# Altium PCB driver.PcbDoc
Units mm, origin at the board's own origin, x right, y up, seen from the top; angles counter-clockwise.
Board outline 80 x 80 mm, 2 copper layers (Top Layer, Bottom Layer), stack 1.569 mm thick; 40 components, 32 nets, 130 pads, 25 vias.
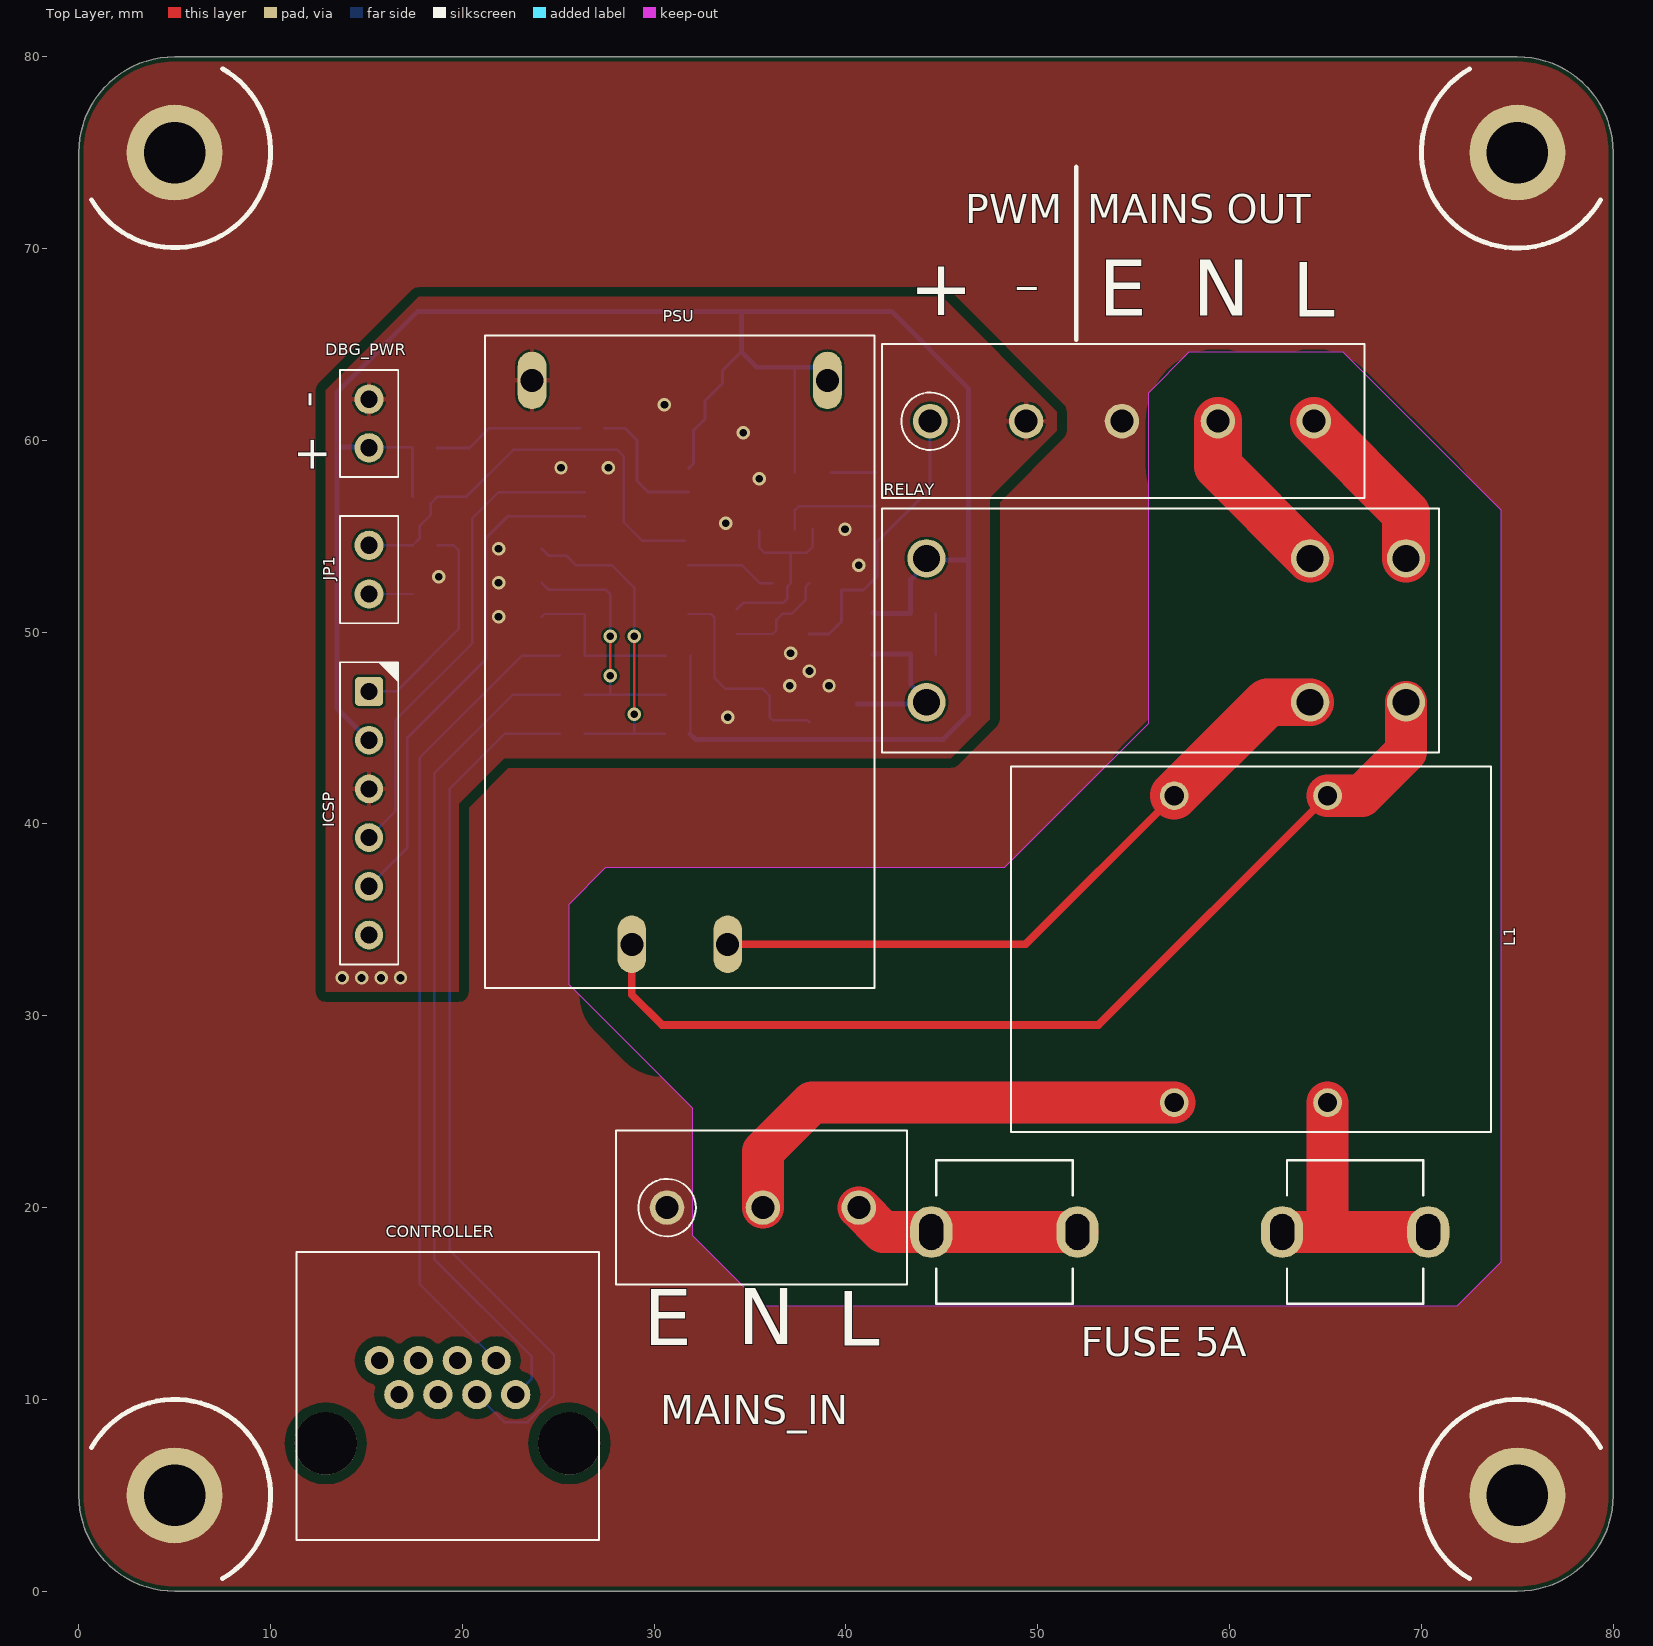
[diagram p0: Top Layer view]
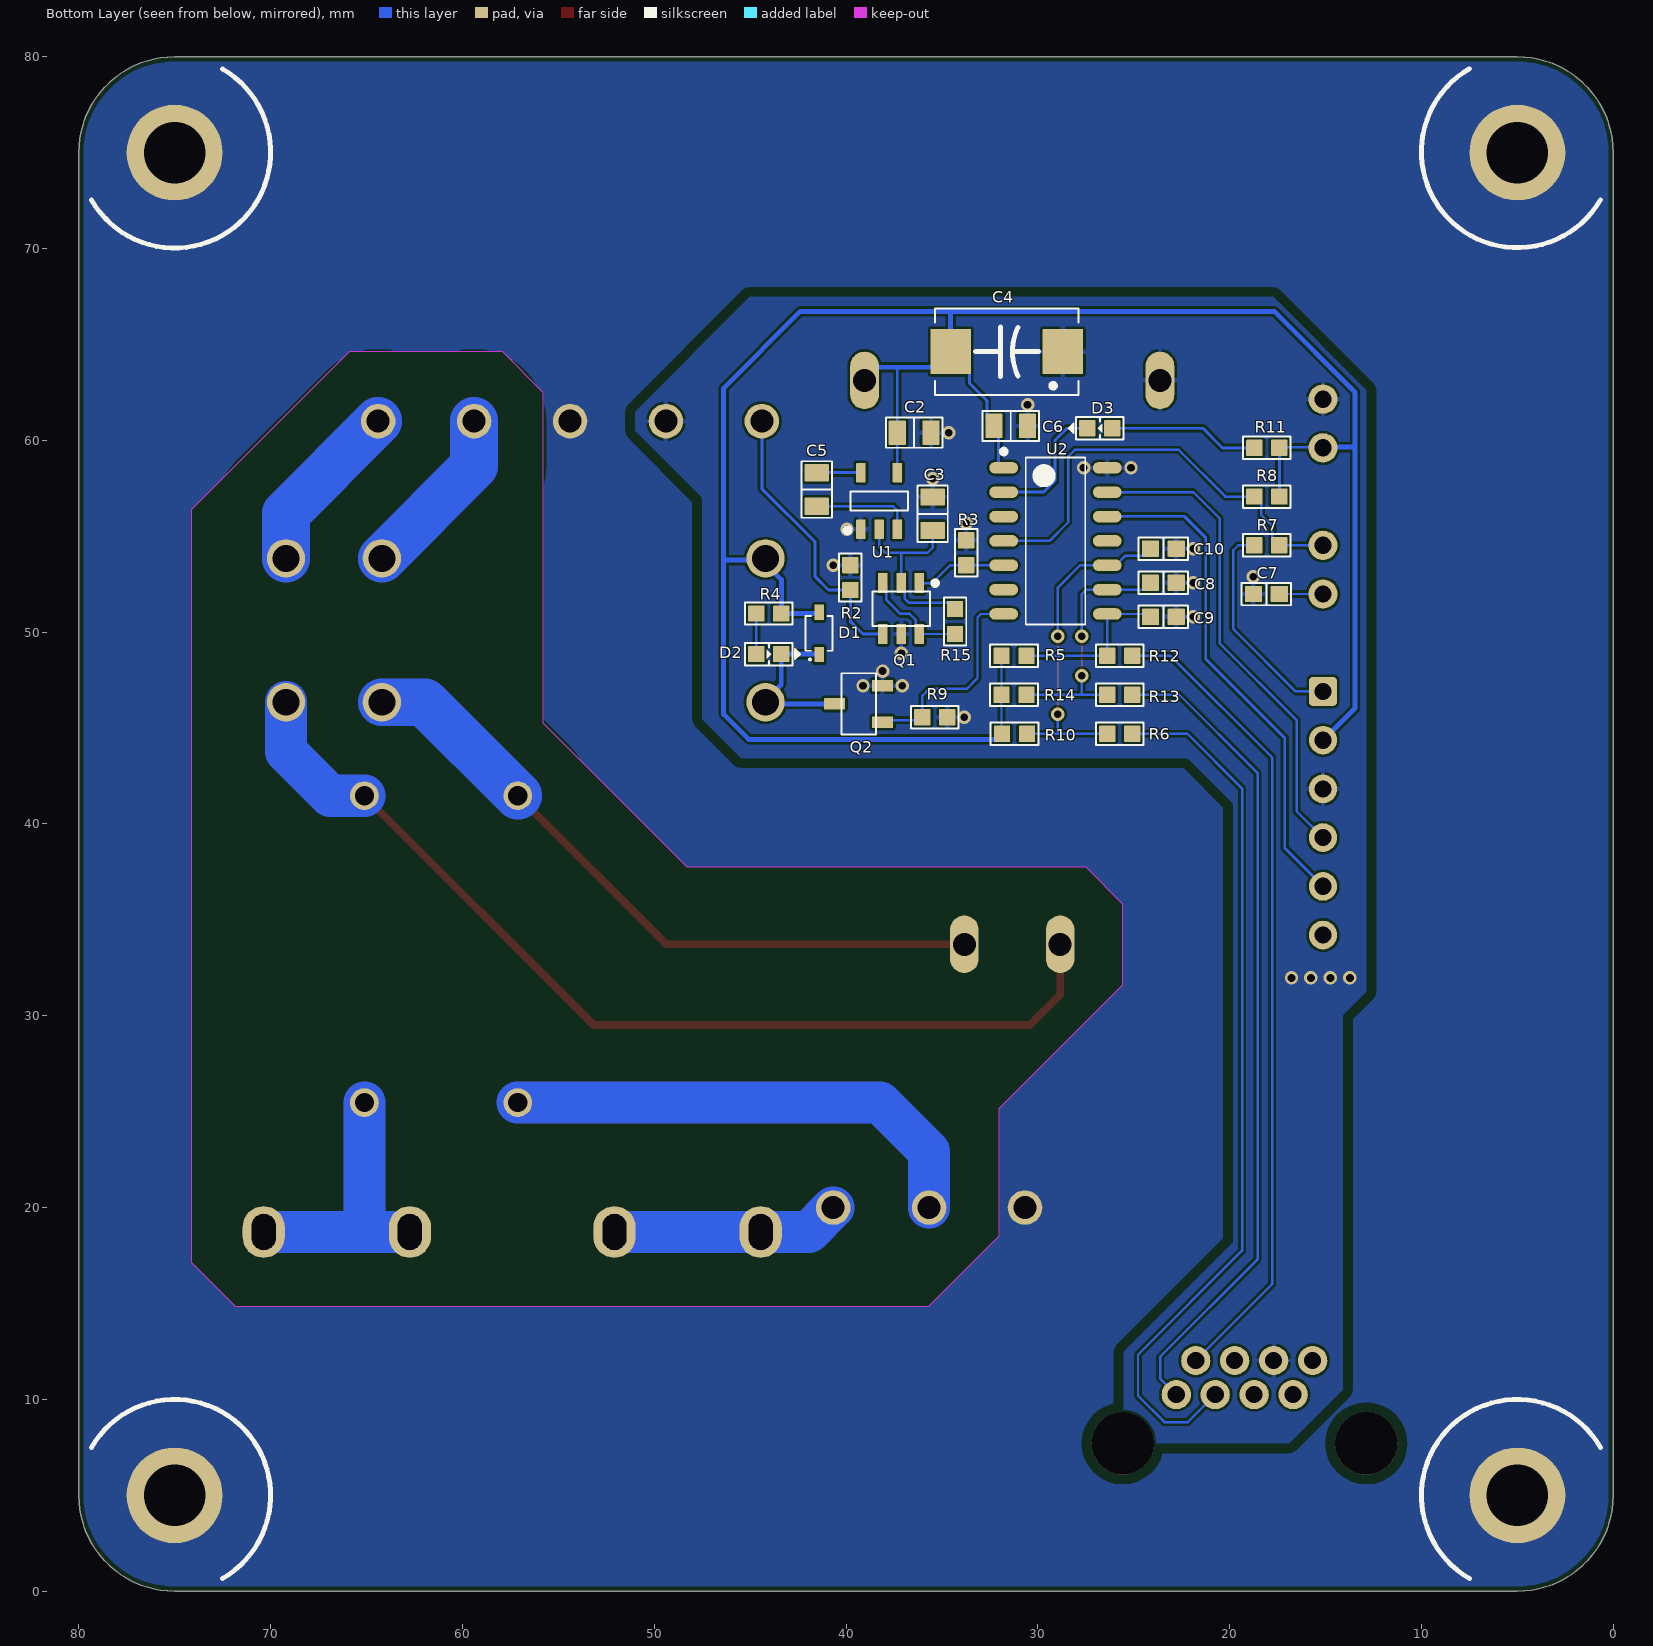
[diagram p1: Bottom Layer view, seen from below]

## Layer stack, top to bottom
Top Solder: solder mask 0.0254, SM-001, Dk 4
Top Layer: signal copper 0.035
Dielectric 1: core 1.4986, Core-043, Dk 4.3
Bottom Layer: signal copper 0.035
Bottom Solder: solder mask 0.0254, SM-001, Dk 4

## Board outline
5,0 cw(c5,5) 0,5 0,75 cw(c5,75) 5,80 75,80 cw(c75,75) 80,75 80,5 cw(c75,5) 75,0

## Design rules (kind name [scope] priority, off if disabled: settings)
BoardOutlineClearance [NOT (OnLayer('Top Overlay') OR OnLayer('Bottom Overlay'))] p1: gap=0.254 ignorepadtopadclearanceinfootprint=FALSE
Clearance Clearance_Earth_KO [InNet('EARTH') vs IsKeepOut OR (NOT InNetClass('MAINS'))] p1: gap=0.5 ignorepadtopadclearanceinfootprint=FALSE
Clearance Clearance_Earth_NPTH [InNet('EARTH') vs IsPad AND (NOT PadIsPlated)] p2: gap=0.25 ignorepadtopadclearanceinfootprint=FALSE
Clearance Clearance_Earth [InNetClass('MAINS')] p3: gap=2.5 ignorepadtopadclearanceinfootprint=FALSE
Clearance Clearance_Other [All] p4: gap=0.127 ignorepadtopadclearanceinfootprint=FALSE
ComponentClearance [All] p1: gap=0 collisioncheckmode=3 verticalgap=0.254 showdistances=FALSE
HoleSize [All] p1: absolutevalues=TRUE maxlimit=5 minlimit=0.4 maxpercent=80.000 minpercent=20.000
MinimumAnnularRing [All] p1: minimumring=0.15
MinimumSolderMaskSliver [All] p1: minsoldermaskwidth=0.1
PolygonConnect PolygonConnect_GndVia [IsVia AND InNet('GND') vs InNet('GND')] p1: connectstyle=Direct reliefconductorwidth=0.254 reliefentries=4 polygonreliefangle="90 Angle" airgapwidth=0.152
PolygonConnect PolygonConnect_EarthPads [IsPad AND (InComponent('PWM  MAINS OUT') OR InComponent('MAINS_IN')) vs InNet('EARTH')] p2: connectstyle=Direct reliefconductorwidth=0.254 reliefentries=4 polygonreliefangle="90 Angle" airgapwidth=0.152
PolygonConnect [All] p3: connectstyle=Relief reliefconductorwidth=0.254 reliefentries=4 polygonreliefangle="90 Angle" airgapwidth=0.127
RoutingVias [All] p1: holewidth=0.711 width=1.27 viastyle="Through Hole" minholewidth=0.711 minwidth=1.27 maxholewidth=0.711 maxwidth=1.27 useviatemplates=TRUE viatemplateguid#1={4F68C366-C401-404B-B93B-24472A54F0F3} viatemplatename#1=GND_VIA
SilkToSilkClearance [All] p1: silktosilkclearance=0
SilkToSolderMaskClearance [All] p1: minsilkscreentomaskgap=0 clearancetoexposedcopper=TRUE
SolderMaskExpansion [All] p1: expansion=0.102 istentingtop=FALSE
Width Width_Mains [InNetClass('MAINS')] p1: maxlimit=4 minlimit=0.254 preferedwidth=0.254
Width Width_Normal [All] p2: maxlimit=0.508 minlimit=0.127 preferedwidth=0.127 minimp=50.000000 maximp=50.000000 favimp=50.000000
25 further rules are at their usual default settings.

## Classes and differential pairs
net class MAINS: ACL ACL_F ACL_R ACL_S ACN ACN_R ACN_S EARTH

## Components (designator, comment, footprint, x,y, rotation, side; value= is the part's Value field where it differs from the comment)
C2 "1uF" "CAP 0805_2012" 36.447,60.402 r180 bottom
C3 "10uF" "CAP 0805_2012" 35.484,56.172 r90 bottom
C4 "47uF" CAPMP7343X11L 31.618,64.626 r0 bottom
C5 "10uF" "CAP 0805_2012" 41.524,57.438 r270 bottom
C6 "100nF" "CAP 0805_2012" 31.41,60.753 r180 bottom
C7 "10nF" "CAP 0603_1608" 18.085,51.99 r0 bottom
C8 "1nF" "CAP 0603_1608" 23.455,52.578 r180 bottom
C9 "1nF" "CAP 0603_1608" 23.455,50.8 r180 bottom
C10 "1nF" "CAP 0603_1608" 23.455,54.356 r180 bottom
CONTROLLER "RJ45JACK" RJHSE-5080 12.876,7.71 r0 top
D1 "DSF05S30U" SODFL250X100-2L 41.403,49.933 r90 bottom
D2 "20mA" "SMT_LED 0603_RED" 44.024,48.858 r180 bottom
D3 "20mA" "SMT_LED 0603_RED" 26.767,60.631 r0 bottom
DBG_PWR "JUMPER" JUMPER 15.132,59.61 r90 top
"FUSE 5A" "520_102701" BEL_FC-102-BRIGHT-TIN 48.259,18.73 r0 top
ICSP "HEADER6" HEADER6 15.132,46.91 r270 top
JP1 "JUMPER" JUMPER 15.132,54.53 r270 top
L1 "CHOKE" SC-40-200 57.11,25.474 r0 top
MAINS_IN "TERMINAL3" TERMINAL_BLOCK_3 30.668,20 r0 top
PSU "HLK-PM01" HLK-PM01 31.332,33.726 r90 top
"PWM  MAINS OUT" "TERMINAL5" TERMINAL_BLOCK_5 44.388,61 r0 top
Q1 "MOSFET-NP" DMG6601LVT 37.128,51.232 r270 bottom
Q2 "MOSFET-N" SOT23 39.345,46.26 r90 bottom
R2 "1K8" "RES 0603_1608" 39.776,52.847 r90 bottom
R3 "20K" "RES 0603_1608" 33.731,54.139 r270 bottom
R4 "4K7" "RES 0603_1608" 44.024,50.974 r180 bottom
R5 "20K" "RES 0603_1608" 31.242,48.768 r0 bottom
R6 "22r" "RES 0603_1608" 25.728,44.704 r0 bottom
R7 "100r" "RES 0603_1608" 18.06,54.53 r0 bottom
R8 "10K" "RES 0603_1608" 18.06,57.07 r0 bottom
R9 "20K" "RES 0603_1608" 35.369,45.564 r0 bottom
R10 "20K" "RES 0603_1608" 31.212,44.704 r0 bottom
R11 "4K7" "RES 0603_1608" 18.06,59.61 r180 bottom
R12 "22r" "RES 0603_1608" 25.728,48.768 r0 bottom
R13 "22r" "RES 0603_1608" 25.728,46.736 r0 bottom
R14 "20K" "RES 0603_1608" 31.242,46.736 r0 bottom
R15 "1K8" "RES 0603_1608" 34.315,50.557 r90 bottom
RELAY "HF118F" G5RL-1-E-HR 44.196,46.348 r0 top
U1 "MAX1683" SOT23-5 38.273,56.84 r90 bottom
U2 "PIC16F616" SOIC14 29.078,54.759 r180 bottom

## Footprints (in the part's own frame and the unit in brackets; to place one, negate y for a bottom-side part, rotate by r counter-clockwise, add the part's x,y. Pads: shape width x height; smd on the part's side, far side on the other; paste and mask are expansions set on the pad)
BEL_FC-102-BRIGHT-TIN [mm]
  oval 2.2x2.7 hole 1.88 slot 1.25 at 0 deg: 1(-3.81,0) 1(3.81,0) 2(14.478,0) 2(22.098,0)
  silkscreen extent -3.56,-3.75 21.84,3.75, body extent -4.06,-3.68 22.35,3.68, height 10.9
"CAP 0603_1608" [mm] "Chip Capacitor, 2-Leads, Body 1.60x0.80mm, IPC Medium Density"
  rrect10% 0.9x0.85 smd: 1(-0.675,0) 2(0.675,0)
  silkscreen extent -1.3,-0.58 1.3,0.58, body extent -0.8,-0.41 0.8,0.41, height 0.82
"CAP 0805_2012" [mm] "Chip Capacitor, 2-Leads, Body 2.00x1.20mm, IPC Medium Density"
  rrect10% 0.9x1.275 smd: 1(-0.876,0) 2(0.876,0)
  silkscreen extent -1.47,-0.79 1.47,0.79, body extent -1,-0.64 1,0.64, height 1.26
CAPMP7343X11L [mm] "Molded Capacitor, 2-Leads, Body 7.30x4.30mm, IPC High Density"
  rrect1% 2.1x2.35 smd: 1(2.925,0) 2(-2.925,0)
  silkscreen extent -3.75,-2.25 3.75,2.25, body extent -3.97,-2.25 3.97,2.25, height 1.1
DMG6601LVT [mm]
  rrect10% 1.05x0.5 smd: 1(-1.325,0.95) 2(-1.325,0) 3(-1.325,-0.95) 4(1.325,-0.95) 5(1.325,0) 6(1.325,0.95)
  silkscreen extent -1.45,-1.5 0.9,1.9, body extent -1.4,-1.45 1.4,1.45, height 1
G5RL-1-E-HR [mm] "16A 240v relay 5v coil 62.5ohm"
  round 2 hole 1.4: 1(0,0) 2(0,7.5) 3(20,0) 4(20,7.5) 5(25,0) 6(25,7.5)
  silkscreen extent -2.31,-2.62 26.72,10.11, body extent -2.3,-2.6 26.7,10.1, height 15.7
HEADER6 [mm] "6 pin 2.54mm header"
  rrect25% 1.5x1.45 hole 0.9: 1(0,0)
  oval 1.5x1.45 hole 0.9: 2(2.54,0) 3(5.08,0) 4(7.62,0) 5(10.16,0) 6(12.7,0)
  silkscreen extent -1.52,-1.52 14.22,1.68, body extent -1.27,-1.27 13.97,1.27, height 8.54
HLK-PM01 [mm] "5V PSU"
  oval 3x1.5 hole 1.2: 1(0,2.5) 2(0,-2.5) 3(29.4,7.7) 4(29.4,-7.7)
  silkscreen extent -2.29,-10.16 31.75,10.16, body extent -2.3,-10.1 31.7,10.1, height 15
JUMPER [mil] "2 pin 2.54mm jumper"
  round 60 hole 35.43: 1(0,0) 2(100,0)
  silkscreen extent -60,-60 160,60, body extent -50,-50 150,50, height 336
"RES 0603_1608" [mm] "Chip Resistor, 2-Leads, Body 1.60x0.80mm, IPC Medium Density"
  rrect10% 0.85x0.85 smd: 1(-0.65,0) 2(0.65,0)
  silkscreen extent -1.24,-0.58 1.24,0.58, body extent -0.8,-0.4 0.8,0.4, height 0.45
RJHSE-5080 [mil] "RJ45 Jack"
  round 60 hole 35: 1(390,100) 2(350,170) 3(310,100) 4(270,170) 5(230,100) 6(190,170) 7(150,100) 8(110,170)
  round 128 hole 128 unplated: M1(0,0) M2(500,0)
  silkscreen extent -60,-199 561,393, body extent -59,-198 561,392, height 506
SC-40-200 [mm] "Common mode choke"
  round 1.5 hole 1: 1(8,0) 2(8,16) 3(0,0) 4(0,16)
  silkscreen extent -8.51,-1.52 16.51,17.53, body extent -8.5,-1.5 16.5,17.5, height 22.34
"SMT_LED 0603_RED" [mm] "Chip Diode, 2-Leads, Body 1.60x0.80mm, IPC Medium Density"
  rrect10% 0.85x0.85 smd: 1(0.65,0) 2(-0.65,0)
  silkscreen extent -1.24,-0.58 1.63,0.58, body extent -0.8,-0.4 0.8,0.4, height 0.53
SODFL250X100-2L [mm] "SODFL, 2-Leads, Body 1.25x2.50mm, IPC High Density"
  rrect1% 0.8x0.5 smd: 1(1.1,0) 2(-1.1,0)
  silkscreen extent -1.4,-0.7 0.9,0.7, body extent -1.25,-0.68 1.25,0.68, height 1
SOIC14 [mm] "SOIC, 14-Leads, Body 8.65x3.90mm, Pitch 1.27mm, IPC Medium Density"
  oval 1.5x0.6 smd: 1(-2.7,3.81) 2(-2.7,2.54) 3(-2.7,1.27) 4(-2.7,0) 5(-2.7,-1.27) 6(-2.7,-2.54) 7(-2.7,-3.81) 8(2.7,-3.81) 9(2.7,-2.54) 10(2.7,-1.27) 11(2.7,0) 12(2.7,1.27) 13(2.7,2.54) 14(2.7,3.81)
  silkscreen extent -2.83,-4.35 1.55,4.78, body extent -3,-4.35 3,4.35, height 1.75
SOT23 [mm] "SOT23, 3-Leads, Body 2.90x2.30mm, Pitch 0.95mm, IPC High Density"
  rrect10% 0.6x1.1 smd: D(0,1.25) G(-0.95,-1.25) S(0.95,-1.25)
  silkscreen extent -1.6,-0.9 1.6,0.9, body extent -1.5,-1.3 1.5,1.3, height 1.1
SOT23-5 [mm] "SOT23, 5-Leads, Body 2.90x2.80mm, Pitch 0.95mm, IPC Medium Density"
  rrect10% 1x0.5 smd: 1(-1.475,0.95) 2(-1.475,0) 3(-1.475,-0.95) 4(1.475,-0.95) 5(1.475,0.95)
  silkscreen extent -1.65,-1.5 0.5,1.78, body extent -1.5,-1.5 1.5,1.5, height 1.25
TERMINAL_BLOCK_3 [mm] "3 Way 5mm screw terminal block"
  round 1.8 hole 1.2: 1(0,0) 2(5,0) 3(10,0)
  silkscreen extent -2.67,-4.01 12.52,4.01, body extent -2.65,-4 12.5,4, height 10
TERMINAL_BLOCK_5 [mm] "5 Way 5mm screw terminal block"
  round 1.8 hole 1.2: 1(0,0) 2(5,0) 3(10,0) 4(15,0) 5(20,0)
  silkscreen extent -2.5,-4.01 22.65,4.01, body extent -2.5,-4 22.65,4, height 10

## Part data
C2 C3 C5 C6 C7 C8 C9 C10: library part CAP_CERAMIC, "Ceramic capacitor"
C4: library part EEFCS1A470R, "Electrolytic Capacitor", Voltage=6.3V, MPN=EEFCS1A470R, TYPE=Polymer, Vendor=Panasonic
D1: "Schottky Diode 20v 500mA", Alternate=CUS551V30
D2 D3: library part LED, "LED"
"FUSE 5A": "5x20 5A fuse speed F"
MAINS_IN: "3 way terminal block"
PSU: "5V PSU 0.6A"
"PWM  MAINS OUT": "5 way terminal block"
Q1: "N/P Channel MOSFET", LCSC Part Number=C500791, Manufacturer Part Number=DMC2400UV-13
R2 R3 R4 R5 R6 R7 R8 R9 R10 R11 R12 R13 R14 R15: library part RESISTOR, "Resistor"
RELAY: "240V 10A Relay 5V"
U1: "Charge Pump"

## Free pads (board coordinates)
  round 5 hole 3.2: 1(5,5) 1(5,75) 1(75,5) 1(75,75)

## Via types
v1: diameter 0.7, hole 0.4, Top Layer to Bottom Layer, tented both sides, 25 vias

## Nets (pads, with @x,y where several pads share a name; then routed paths per layer and width w, separated by ;. In a path a pad name is that pad's centre, name@x,y a point inside that pad or via, vN(x,y) a via of type N, cw(c..) or ccw(c..) an arc to the next point about the centre after c; other vN are vias at no path point)
\MCLR: JP1.1 R7.1 R8.2 U2.4 | length 23.2
  Bottom Layer w0.127: JP1.1 R7.1 17.771,54.892 17.771,55.539 18.351,56.119 18.351,56.711 R8.2 20.218,57.07 22.66,59.512 28.069,59.512 28.415,59.166 28.415,55.735 29.392,54.759 U2.4@31.59,54.759
\MCLR_IN: ICSP.1 R7.2 | length 11.3
  Bottom Layer w0.127: ICSP.1 16.557,46.91 19.812,50.165 19.812,54.27 19.552,54.53 R7.2
ACL: L1.2 PSU.1 RELAY.5 | length 61.5
  Top Layer w0.406: PSU.1 28.832,31.105 30.414,29.523 53.158,29.523 L1.2
  Top Layer w2.2: L1.2 66.891,41.474 69.196,43.779 RELAY.5
  Bottom Layer w2.2: RELAY.5 69.196,43.779 66.891,41.474 ; 66.891,41.474 L1.2 66.891,41.474
ACL_F: "FUSE 5A.2" L1.1 | length 28.7
  Top Layer w2.2: 62.737,18.73 65.11,18.73 ; L1.1 65.11,18.73 ; 70.357,18.73 65.11,18.73
  Bottom Layer w2.2: 62.737,18.73 65.11,18.73 ; L1.1 65.11,18.73 ; 70.357,18.73 65.11,18.73
ACL_R: "FUSE 5A.1" MAINS_IN.3 | length 23.9
  Top Layer w2.2: MAINS_IN.3 41.938,18.73 44.449,18.73 52.069,18.73
  Bottom Layer w2.2: MAINS_IN.3 41.938,18.73 44.449,18.73 52.069,18.73
ACL_S: "PWM  MAINS OUT.5" RELAY.6 | length 18.3
  Top Layer w2.5: 64.388,61 69.196,56.192 RELAY.6
  Bottom Layer w2.5: 64.388,61 69.196,56.192 RELAY.6
ACN: L1.4 PSU.2 RELAY.3 | length 44.7
  Top Layer w0.406: PSU.2 49.362,33.726 L1.4
  Top Layer w2.5: L1.4 61.984,46.348 RELAY.3
  Bottom Layer w2.5: L1.4 61.984,46.348 RELAY.3
ACN_R: L1.3 MAINS_IN.2 | length 50.8
  Top Layer w2.2: MAINS_IN.2 35.668,22.918 38.224,25.474 L1.3
  Bottom Layer w2.2: MAINS_IN.2 35.668,22.918 38.224,25.474 L1.3
ACN_S: "PWM  MAINS OUT.4" RELAY.4 | length 18.3
  Top Layer w2.5: 59.388,61 59.388,58.656 RELAY.4
  Bottom Layer w2.5: 59.388,61 59.388,58.656 RELAY.4
BTN: C10.1 R6.2 R10.1 U2.10 | length 17.2
  Top Layer w0.127: v1(28.956,45.72) v1(28.956,49.783)
  Bottom Layer w0.127: C10.1 24.492,53.994 25.422,53.994 25.928,53.489 27.791,53.489 28.956,52.324 v1@28.956,50.037 ; R6.2 28.956,44.704 ; v1(28.956,45.72) 28.956,44.704 ; R10.1 28.956,44.704
BTN_IN: CONTROLLER.3 R6.1 | length 46
  Bottom Layer w0.127: CONTROLLER.3 22.185,8.815 23.401,8.815 24.776,10.191 24.776,12.329 19.347,17.758 19.347,41.849 22.202,44.704 R6.1
DBG_LED: D3.1 U2.2 | length 7
  Bottom Layer w0.152: D3.1 28.479,60.631 29.103,60.006 29.103,57.892 29.696,57.299 U2.2
EARTH: "PWM  MAINS OUT.3" MAINS_IN.1 pad.1
ENCA: C8.1 R13.2 R14.1 U2.9 | length 13
  Top Layer w0.127: v1(27.716,47.722) v1(27.716,49.783)
  Bottom Layer w0.127: C8.1 24.489,52.219 27.469,52.219 27.716,51.972 v1@27.716,50.037 ; R13.2 27.716,46.736 ; v1(27.716,47.722) 27.716,46.736 ; R14.1 27.716,46.736
ENCA_IN: CONTROLLER.1 R13.1 | length 43.1
  Bottom Layer w0.127: CONTROLLER.1 23.621,11.089 23.621,12.225 18.544,17.302 18.544,42.657 22.623,46.736 R13.1
ENCB: C9.1 R5.1 R12.2 U2.8 | length 8.7
  Bottom Layer w0.127: C9.1 24.279,50.949 U2.8 R12.2 ; R12.2@26.415,48.768 R5.1
ENCB_IN: CONTROLLER.2 R12.1 | length 42.6
  Bottom Layer w0.127: CONTROLLER.2 17.78,16.014 17.78,43.461 23.087,48.768 R12.1
GND: "PWM  MAINS OUT.2" C2.2 C3.2 C4.2 C6.2 C7.2 C8.2 C9.2 C10.2 CONTROLLER.6 DBG_PWR.2 ICSP.3 PSU.3 Q1.5 Q2.S R2.2 R3.1 R9.1 U1.1 U2.14
  other v1: 13.728,31.975 14.744,31.975 15.76,31.975 16.776,31.975 33.835,45.57 37.076,47.21 39.113,47.21 38.095,47.973 37.109,48.909 21.887,50.8 21.887,52.578 18.76,52.883 40.665,53.497 21.887,54.356 39.948,55.365 33.731,55.681 35.484,58.001 25.142,58.569 27.615,58.569 34.643,60.402 30.534,61.858
ICSPCLK: ICSP.5 U2.12 | length 26.3
  Bottom Layer w0.152: ICSP.5 17.127,38.745 17.127,44.48 21.244,48.597 21.244,54.925 22.363,56.044 26.363,56.044 U2.12
ICSPDAT: ICSP.4 U2.13 | length 25.3
  Bottom Layer w0.127: ICSP.4 16.509,40.667 16.509,45.413 20.514,49.418 20.514,55.922 21.891,57.299 U2.13
NetC5_1: C5.1 U1.5 | length 2.3
  Bottom Layer w0.152: U1.5 C5.1
NetC5_2: C5.2 U1.3 | length 5.3
  Bottom Layer w0.127: U1.3 37.323,56.35 37.535,56.562 C5.2
NetC7_1: C7.1 JP1.2 | length 2.3
  Bottom Layer w0.127: JP1.2 C7.1
NetD1_2: D1.2 D2.1 Q2.D RELAY.1 | length 8.8
  Bottom Layer w0.254: Q2.D 44.388,46.26 43.374,47.274 D2.1 41.428,48.858 D1.2
NetD2_2: D2.2 R4.1 | length 2.1
  Bottom Layer w0.127: D2.2 R4.1
NetD3_2: D3.2 R11.1 | length 7.9
  Bottom Layer w0.152: R11.1@18.661,59.61 20.367,59.61 21.388,60.631 D3.2
NetQ1_DN: Q1.3 Q1.6 R15.1 | length 5.6
  Bottom Layer w0.127: R15.1 Q1.6 36.364,50.093 36.364,50.642 36.676,50.954 37.166,50.954 37.891,51.679 37.891,52.37 Q1.3
ON_OFF: Q2.G R9.2 U2.7 | length 11.2
  Bottom Layer w0.127: U2.7 32.954,50.949 33.144,50.759 33.144,47.603 33.706,47.041 35.665,47.041 36.019,46.687 R9.2 36.169,45.414 37.991,45.414 Q2.G
PWM: Q1.1 R3.2 U2.5 | length 4.8
  Bottom Layer w0.127: U2.5 R3.2 34.572,53.489 35.504,52.557 Q1.1
PWM_OUT: "PWM  MAINS OUT.1" Q1.4 R2.1 | length 15
  Bottom Layer w0.152: Q1.4 39.112,49.907 39.776,50.571 R2.1 40.91,52.197 41.605,52.892 41.605,54.695 44.388,57.478 44.388,61
VCC5: C2.1 C4.1 C6.1 D1.1 DBG_PWR.1 ICSP.2 PSU.4 R4.2 R5.2 R8.1 R10.2 R11.2 R14.2 RELAY.2 U1.4 U2.1 | length 125.1
  Bottom Layer w0.127: R10.2@31.892,44.704 R14.2 R5.2 ; U1.4 C2.1 37.323,63.813
  Bottom Layer w0.152: DBG_PWR.1 15.166,59.644 17.41,59.644 R11.2 R8.1 ; U2.1 31.832,58.569 32.039,58.775 32.039,60.506 C6.1 32.66,61.127 32.66,62.076 33.569,62.986 33.569,63.652 C4.1
  Bottom Layer w0.254: DBG_PWR.1@15.097,59.645 13.462,59.645 ; ICSP.2 13.462,46.04 13.462,59.645 ; R10.2 32.152,44.414 45.078,44.414 46.38,45.717 46.38,53.76 ; PSU.4 39.032,63.237 38.456,63.813 37.323,63.813 35.356,63.813 C4.1 34.543,66.722 ; D1.1 41.462,50.974 R4.2 ; R4.2 43.372,52.744 44.388,53.76 46.38,53.76 ; 13.462,59.645 13.462,62.502 17.682,66.722 34.543,66.722 ; 34.543,66.722 42.378,66.722 46.38,62.719 46.38,53.76
VCC10: C3.1 Q1.2 R15.2 U1.2 | length 10.1
  Bottom Layer w0.127: R15.2 34.636,51.528 36.718,51.528 36.946,51.755 36.946,52.375 Q1.2 37.128,54.153 ; C3.1 35.484,54.404 35.735,54.153 37.128,54.153 ; U1.2 38.273,54.468 37.957,54.153 37.128,54.153
pads on no net: CONTROLLER.4 CONTROLLER.5 CONTROLLER.7 CONTROLLER.8 CONTROLLER.M1 CONTROLLER.M2 ICSP.6 U2.3 U2.6 U2.11

## Polygon pours and split planes (outlines as drawn)
GND on Top Layer "1_GND_BOTTOM" (solid, remove dead copper, pour order 2): 12.876,62.626 17.734,67.484 45.016,67.484 50.998,61.502 50.998,60.498 47.498,56.998 47.498,45.466 45.466,43.434 22.184,43.434 19.812,41.062 19.812,31.242 12.876,31.242
EARTH on Top Layer "2_EARTH_TOP" (solid, remove dead copper, pour order 5): 80,80 80,0 0,0 0,80
GND on Bottom Layer "1_GND_BOTTOM" (solid, remove dead copper, pour order 3): 12.876,62.626 17.734,67.484 45.016,67.484 50.998,61.502 50.998,60.498 47.498,56.998 47.498,45.466 45.466,43.434 22.184,43.434 19.812,41.062 19.812,18.188 25.522,12.478 25.522,7.71 16.894,7.71 14.097,10.507 14.097,30.027 12.876,31.248
EARTH on Bottom Layer "2_EARTH_BOTTOM" (solid, remove dead copper, pour order 4): 80,80 80,0 0,0 0,80

## Keep-outs
Keep-Out Layer:
  pour cut-out: 74.126,56.386 74.126,17.148 71.836,14.858 35.684,14.858 32.016,18.527 32.016,25.169 25.563,31.622 25.563,35.824 27.477,37.738 48.269,37.738 55.78,45.249 55.78,62.491 57.904,64.615 65.894,64.616

## Silkscreen, mask and mechanical layers (free items; w line width, h text height)
Top Overlay:
  lines w0.25: 52,65.25 52,74.25
  lines w0.254: 0.67,7.5 cw(c5,5) 7.5,0.67 ; 0.67,72.544 ccw(c5,75.044) 7.5,79.374 ; 72.5,0.67 cw(c75,5) 79.33,7.5 ; 72.5,79.358 ccw(c75,75.028) 79.33,72.528
  text "-" at 48.715,65.945 h5
  text "+" at 43.287,65.549 h5
  text "E" at 53.178,65.53 h5
  text "N" at 58.076,65.53 h5
  text "L" at 63.263,65.505 h5
  text "-" at 13.266,62.554 h3 r90
  text "+" at 13.509,60.271 h3 r90
  text "N" at 34.356,11.909 h5
  text "E" at 29.458,11.858 h5
  text "L" at 39.544,11.858 h5
Bottom Overlay:
  lines w0.254: 0.67,7.5 cw(c5,5) 7.5,0.67 ; 0.67,72.544 ccw(c5,75.044) 7.5,79.374 ; 72.5,0.67 cw(c75,5) 79.33,7.5 ; 72.5,79.358 ccw(c75,75.028) 79.33,72.528
Board:
  the board outline again, w0.102